# Altium PCB PCB1.PcbDoc
Units mil, origin at the board's own origin, x right, y up, seen from the top; angles counter-clockwise.
Board outline 3937.01 x 2285 mil, 2 copper layers (Top Layer, Bottom Layer); 34 components, 39 nets, 100 pads, 16 vias.
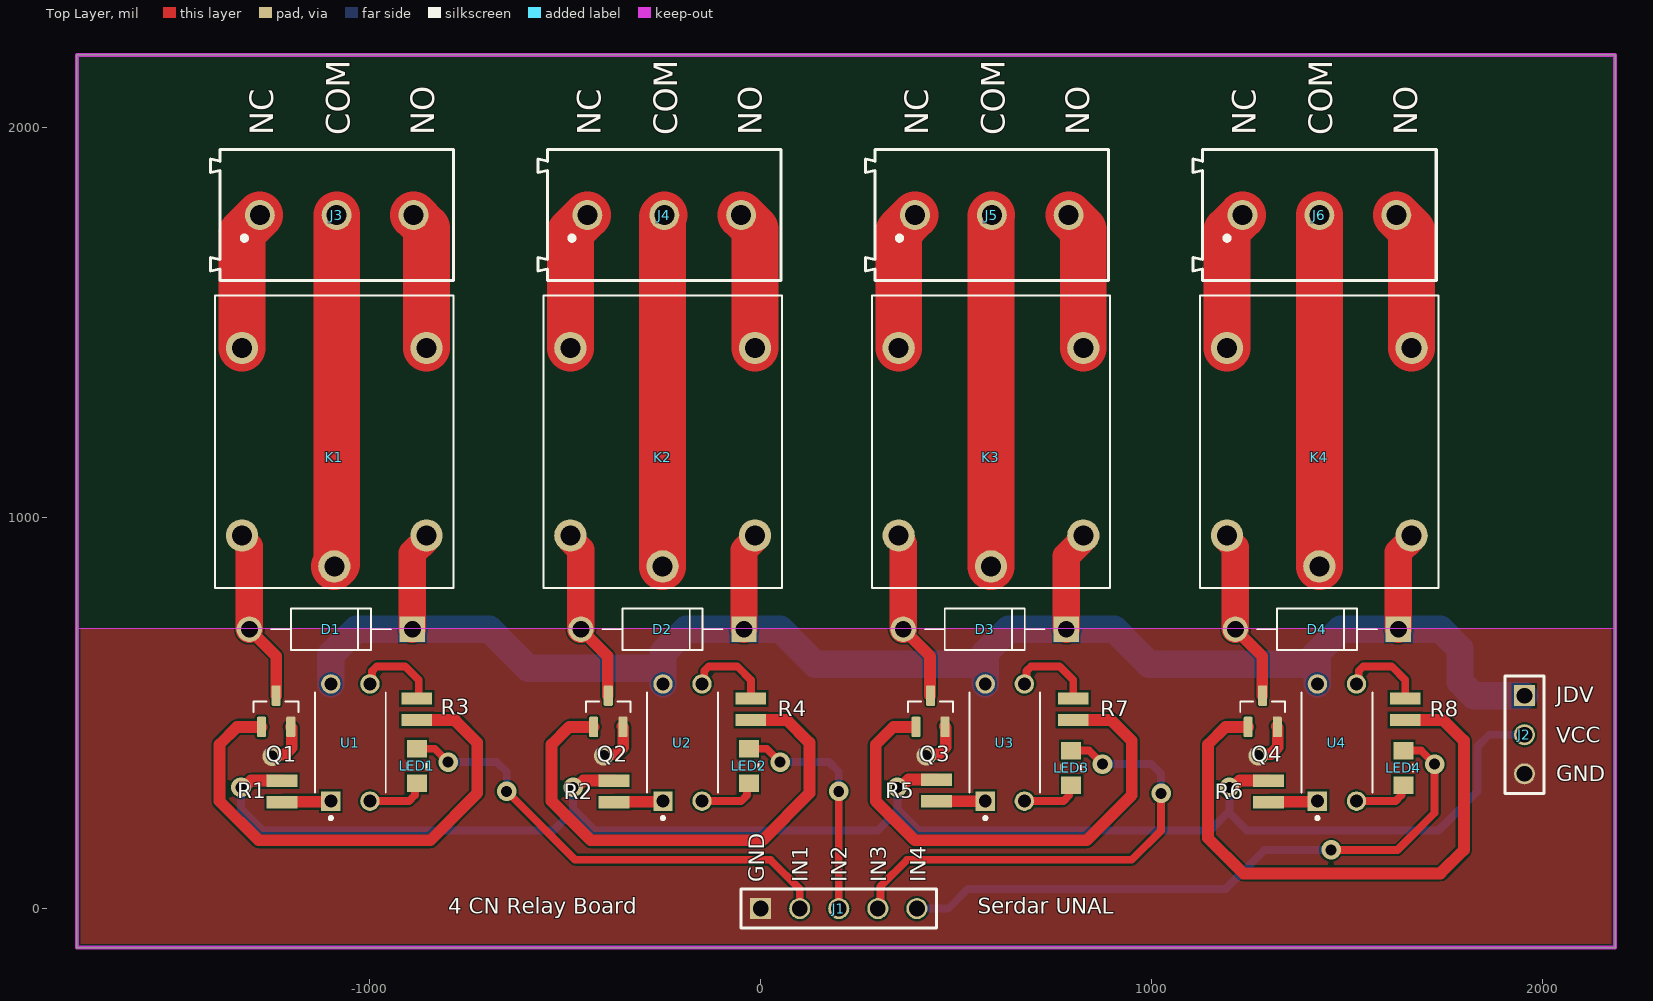
[diagram p0: Top Layer view]
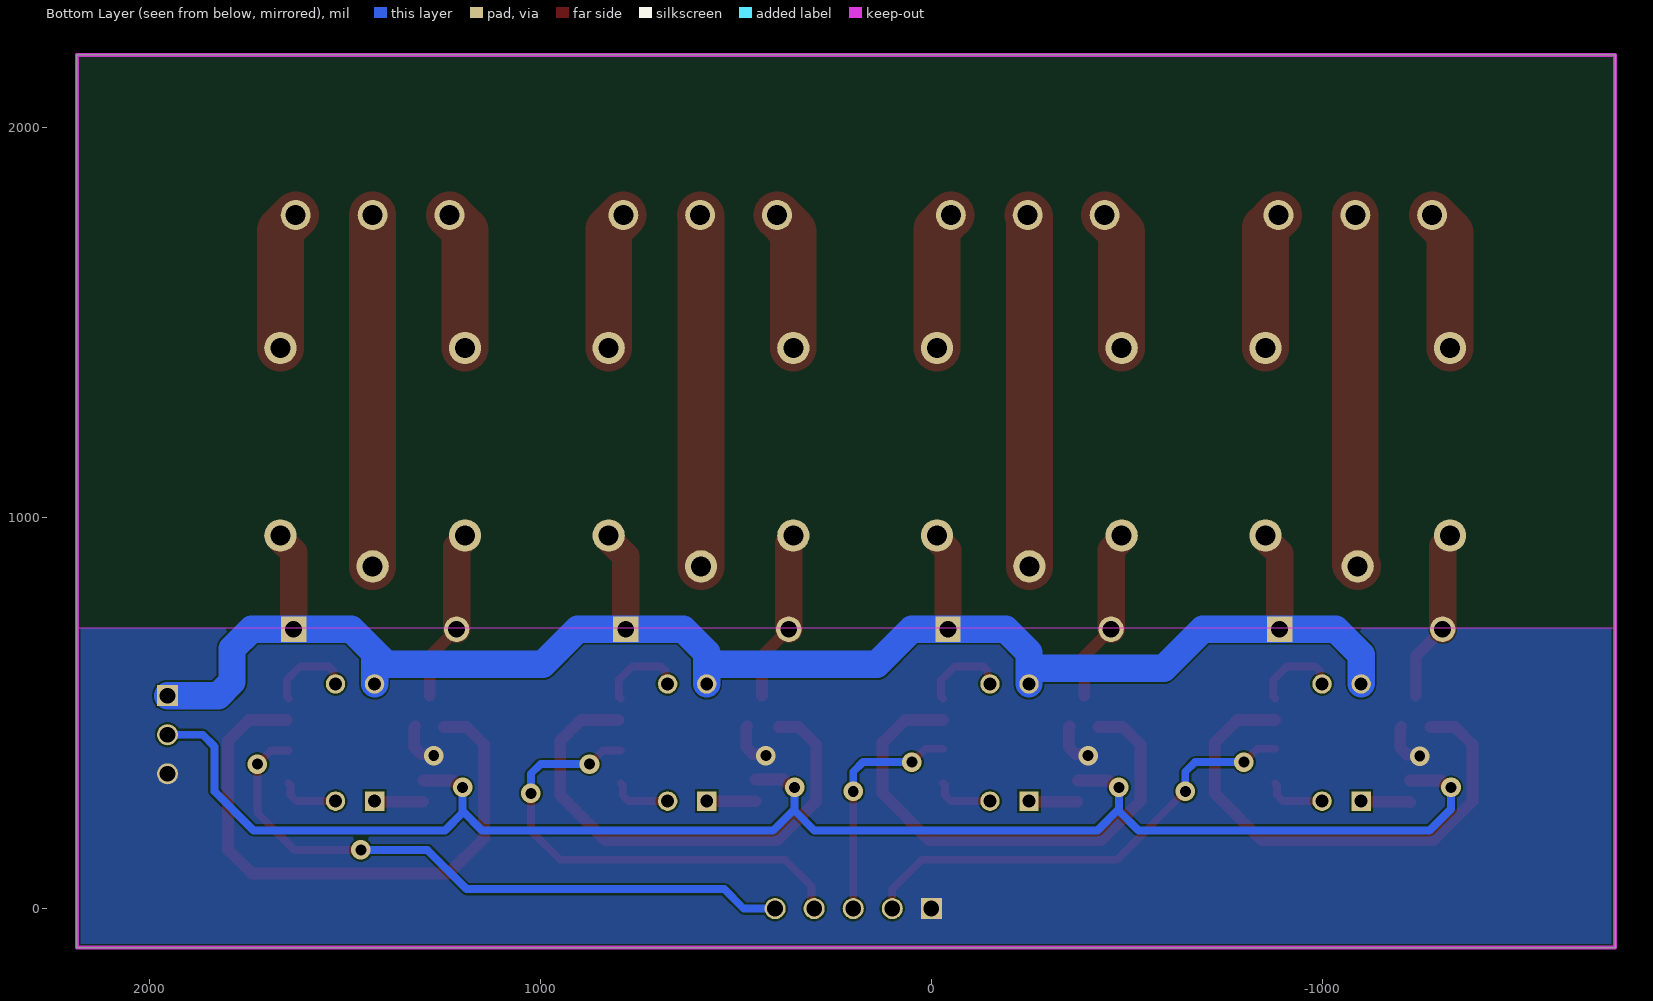
[diagram p1: Bottom Layer view, seen from below]
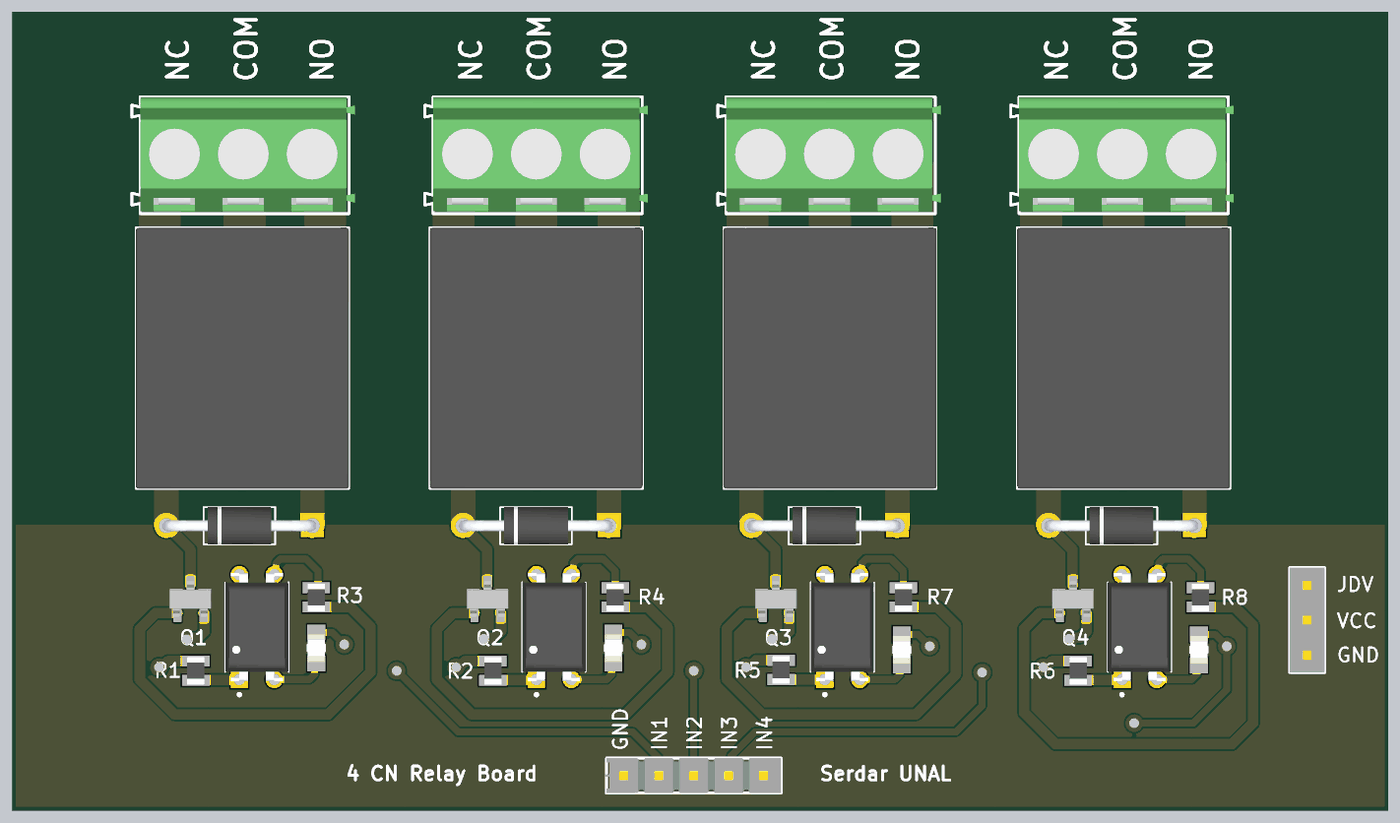
[diagram p2: 3D render of the assembled board from above, using the file's embedded part models]

## Layer stack, top to bottom
Top Solder: solder mask 0.4, Solder Resist, Dk 3.5
Top Layer: signal copper 1.4
Dielectric 1: dielectric 12.6, FR-4, Dk 4.8
Bottom Layer: signal copper 1.4
Bottom Solder: solder mask 0.4, Solder Resist, Dk 3.5

## Board outline
-1750,-100 -1750,2185 2187.01,2185 2187,2184.99 2187,-100

## Design rules (kind name [scope] priority, off if disabled: settings)
Clearance [All] p1: gap=5 ignorepadtopadclearanceinfootprint=FALSE
PolygonConnect [All] p1: connectstyle=Direct reliefconductorwidth=10 reliefentries=4 polygonreliefangle="90 Angle" airgapwidth=10
RoutingVias [All] p1: holewidth=34 width=17 viastyle="Through Hole" minholewidth=17 minwidth=34 maxholewidth=25 maxwidth=50
SolderMaskExpansion [All] p1: expansion=4 istentingtop=FALSE
SupplyNets "Schematic Supply Nets_1" [InNet('VCC')] p1: voltage=0.000
SupplyNets "Schematic Supply Nets" [InNet('GND')] p2: voltage=0.000
Width [All] p1: maxlimit=300 minlimit=10 preferedwidth=100 minimp=50.000000 maximp=50.000000 favimp=50.000000
30 further rules are at their usual default settings.

## Components (designator, comment, footprint, x,y, rotation, side; value= is the part's Value field where it differs from the comment)
D1 "1N4007RLG" 1N4007 -1100,715 r180 top
D2 "1N4007RLG" 1N4007 -251.34,715 r180 top
D3 "1N4007RLG" 1N4007 573.66,715 r180 top
D4 "1N4007RLG" 1N4007 1423.66,715 r180 top
J1 "TSW-105-07-L-S-LL" SAMTEC_TSW-105-07-L-S-LL 0,0 r0 top
J2 "TSW-101-23-S-T" SAMTEC_TSW-101-23-S-T 1955,545 r180 top
J3 "691213710003" 691213710003 -1085,1775 r0 top
J4 "691213710003" 691213710003 -246.67,1775 r0 top
J5 "691213710003" 691213710003 591.67,1775 r0 top
J6 "691213710003" 691213710003 1430,1775 r0 top
K1 "HLS8L-DC5V-S-C" REY5-19.0X15.0X15.0MM -1091.22,1194.84 r90 top
K2 "HLS8L-DC5V-S-C" REY5-19.0X15.0X15.0MM -250.81,1194.84 r90 top
K3 "HLS8L-DC5V-S-C" REY5-19.0X15.0X15.0MM 589.59,1194.84 r90 top
K4 "HLS8L-DC5V-S-C" REY5-19.0X15.0X15.0MM 1430,1194.84 r90 top
LED1 "0805" LED_7012X1 -880,365 r270 top
LED2 "0805" LED_7012X1 -30,365 r270 top
LED3 "0805" LED_7012X1 795,360 r270 top
LED4 "0805" LED_7012X1 1645,360 r270 top
Q1 "MMBT2222A RFG" SOT95P237X112-3N -1240,505 r90 top
Q2 "MMBT2222A RFG" SOT95P237X112-3N -390,505 r90 top
Q3 "MMBT2222A RFG" SOT95P237X112-3N 435,505 r90 top
Q4 "MMBT2222A RFG" SOT95P237X112-3N 1285,505 r90 top
R1 "220" RES_ERJB3CFR12V -1225,300 r90 top
R2 "220" RES_ERJB3CFR12V -375,300 r90 top
R3 "470" RES_ERJB3CFR12V -880,510 r270 top
R4 "470" RES_ERJB3CFR12V -25,510 r270 top
R5 "220" RES_ERJB3CFR12V 450,302.56 r90 top
R6 "220" RES_ERJB3CFR12V 1300,300 r90 top
R7 "470" RES_ERJB3CFR12V 800,510 r270 top
R8 "470" RES_ERJB3CFR12V 1650,510 r270 top
U1 "PC817X3NSZ1B" DIP762W50P254L495H455Q4 -1050,425 r90 top
U2 "PC817X3NSZ1B" DIP762W50P254L495H455Q4 -200,425 r90 top
U3 "PC817X3NSZ1B" DIP762W50P254L495H455Q4 625,425 r90 top
U4 "PC817X3NSZ1B" DIP762W50P254L495H455Q4 1475,425 r90 top

## Footprints (in the part's own frame and the unit in brackets; to place one, negate y for a bottom-side part, rotate by r counter-clockwise, add the part's x,y. Pads: shape width x height; smd on the part's side, far side on the other; paste and mask are expansions set on the pad)
1N4007 [mm]
  round 1.65 hole 1.1 mask+0.102: A(5.3,0)
  rect 1.65x1.65 / inner round 1.65 / far side rect 1.65x1.65 hole 1.1 mask+0.102: C(-5.3,0)
  silkscreen extent -3.9,-1.35 3.9,1.35, body extent -5.57,-1.36 5.57,1.36, height 2.71
691213710003 [mm]
  round 1.95 hole 1.3: 1(-5,0) 2(0,0) 3(5,0)
  silkscreen extent -8.2,-4.25 7.6,4.25, body extent -7.6,-4.06 8,4.24, height 9.54
DIP762W50P254L495H455Q4 [mm]
  rect 1.26x1.26 / inner round 1.26 / far side rect 1.26x1.26 hole 0.84: 1(-3.81,1.27)
  round 1.26 hole 0.84: 2(-3.81,-1.27) 3(3.81,-1.27) 4(3.81,1.27)
  silkscreen extent -5.01,-2.3 3.25,2.3, body extent -3.94,-2.3 3.94,2.3, height 5.06
LED_7012X1 [mm]
  rect 1.15x1.3 smd: A(1.125,0) C(-1.125,0)
  silkscreen extent -0.23,-0.63 0.23,0.63, body extent -1,-0.62 1,0.62, height 0.73
RES_ERJB3CFR12V [mm]
  rect 0.8x2 smd: 1(-0.7,0) 2(0.7,0)
  body extent -1,-0.63 1,0.63, height 0.6
REY5-19.0X15.0X15.0MM [mm]
  round 2.1 hole 1.3: 1(-8.1,0) 2(-6.1,-6) 3(-6.1,6) 4(6.1,-6) 5(6.1,6)
  silkscreen extent -9.5,-7.75 9.5,7.75, body extent -9.5,-7.75 9.5,7.75, height 15.8
SAMTEC_TSW-101-23-S-T [mm]
  rect 1.37x1.37 hole 1.02: 01(0,0)
  round 1.37 hole 1.02: 02(0,2.54) 03(0,5.08)
  silkscreen extent -1.27,-1.27 1.27,6.35, body extent -1.27,-1.27 1.27,6.35, height 8.38
SAMTEC_TSW-105-07-L-S-LL [mm]
  rect 1.37x1.37 hole 1.02: 01(0,0)
  round 1.37 hole 1.02: 02(2.54,0) 03(5.08,0) 04(7.62,0) 05(10.16,0)
  silkscreen extent -1.27,-1.27 11.43,1.27, body extent -1.4,-1.27 11.43,1.27, height 8.38
SOT95P237X112-3N [mm]
  rrect25% 1.32x0.59 smd paste+0 mask+0.102: 1(-1.015,0.95) 2(-1.015,-0.95) 3(1.015,0)
  silkscreen extent -0.04,-1.46 0.65,1.46, body extent -1.3,-1.52 1.3,1.52, height 1.2

## Part data
D1 D2 D3 D4: "Rectifier Diode Switching 1KV 1A 2-Pin DO-41 T/R", Package="DO-41 onsemi", Check_prices=https://www.snapeda.com/parts/1N4007RLG/Onsemi/view-part/?ref=eda, MF=onsemi, MP=1N4007RLG, SnapEDA_Link=https://www.snapeda.com/parts/1N4007RLG/Onsemi/view-part/?ref=snap
J1 J2: Package=None, Availability=Unavailable, Price=None
  J1: MP=TSW-105-07-L-S-LL
  J2: MP=TSW-101-23-S-T
J3 J4 J5 J6: "Serie 213 - 5,0mm pitch - Modular THT - Green - Horizontal cable entry Rising Cage Clamp 10mm height - 03p", Package=None, Check_prices=https://www.snapeda.com/parts/691213710003/Wurth+Electronics/view-part/?ref=eda, MF="Wurth Electronics", MP=691213710003, SnapEDA_Link=https://www.snapeda.com/parts/691213710003/Wurth+Electronics/view-part/?ref=snap
K1 K2 K3 K4: "DIP Power Relay 5V-7A;", Package=None, Check_prices=https://www.snapeda.com/parts/HLS8L-DC5V-S-C/Helishun/view-part/?ref=eda, MF=Helishun, MP=HLS8L-DC5V-S-C, SnapEDA_Link=https://www.snapeda.com/parts/HLS8L-DC5V-S-C/Helishun/view-part/?ref=snap
LED1 LED2 LED3 LED4: library part 7012X1, "Red - LED Indication - Discrete 1.7V 0805 (2012 Metric)", Package="0805 Visual Communications", Check_prices=https://www.snapeda.com/parts/7012X1/VCC/view-part/?ref=eda, MF=VCC, MP=7012X1, SnapEDA_Link=https://www.snapeda.com/parts/7012X1/VCC/view-part/?ref=snap
Q1 Q2 Q3 Q4: "SOT-23, 75V, 0.6A, NPN Transistor", Package="SOT-23 Taiwan Semiconductor", Check_prices=https://www.snapeda.com/parts/MMBT2222A%20RFG/taiwan/view-part/?ref=eda, MF="Taiwan Semiconductor", MP="MMBT2222A RFG", SnapEDA_Link=https://www.snapeda.com/parts/MMBT2222A%20RFG/taiwan/view-part/?ref=snap
R1 R2 R3 R4 R5 R6 R7 R8: library part ERJ-B3CFR12V, Package=None, Availability=Unavailable, MP=ERJB3CFR12V, Price=None
U1 U2 U3 U4: "Optoisolator Transistor Output - 1 Channel 4-DIP", Package="DIP-4 Sharp Microelectronics", Check_prices=https://www.snapeda.com/parts/PC817X3NSZ1B/Sharp/view-part/?ref=eda, MF="Sharp Microelectronics", MP=PC817X3NSZ1B, SnapEDA_Link=https://www.snapeda.com/parts/PC817X3NSZ1B/Sharp/view-part/?ref=snap

## Via types
v1: diameter 50, hole 28, Top Layer to Bottom Layer, tented both sides, 16 vias

## Nets (pads, with @x,y where several pads share a name; then routed paths per layer and width w, separated by ;. In a path a pad name is that pad's centre, name@x,y a point inside that pad or via, vN(x,y) a via of type N, cw(c..) or ccw(c..) an arc to the next point about the centre after c; other vN are vias at no path point)
COM1: J3.2 K1.1 | length 901.6
  Top Layer w120: K1.1 -1085,882.17 J3.2
COM2: J4.2 K2.1 | length 900.8
  Top Layer w120: K2.1 -250.81,1770.85 J4.2
COM3: J5.2 K3.1 | length 899.9
  Top Layer w120: K3.1 589.59,1772.93 J5.2
COM4: J6.2 K4.1 | length 899.1
  Top Layer w120: K4.1 J6.2
GND: J1.01 J2.03 Q1.2 Q2.2 Q3.2 Q4.2 | length 454.3
  Top Layer w30: v1(-1250,390) -1246.17,393.83 -1217.57,393.83 -1200,411.4 -1200,462.44 Q1.2 ; v1(-401.3,391.3) -397.47,395.13 -368.87,395.13 -351.3,412.7 -351.3,463.74 Q2.2@-353.9,466.34 ; v1(423.7,391.3) 427.53,395.13 456.13,395.13 473.7,412.7 473.7,463.74 Q3.2@471.1,466.34 ; v1(1273.7,391.3) 1277.53,395.13 1306.13,395.13 1323.7,412.7 1323.7,463.74 Q4.2@1321.1,466.34
IN1: J1.02 LED1.C | length 1208.1
  Top Layer w20: LED1.C -834.29,409.29 v1(-800,375) ; v1(-650,300) -475,125 25,125 100,50 J1.02
  Bottom Layer w20: v1(-800,375) -675,375 -650,350 v1(-650,300)
IN2: J1.03 LED2.C | length 604.6
  Top Layer w20: LED2.C 15.71,409.29 v1(50,375) ; J1.03 v1(200,300)
  Bottom Layer w20: v1(50,375) 175,375 200,350 v1(200,300)
IN3: J1.04 LED3.C | length 1236.7
  Top Layer w20: J1.04 306.49,6.49 306.49,56.49 375,125 950,125 1025,200 v1(1025,295) ; LED3.C 840.71,404.29 v1(875,370)
  Bottom Layer w20: v1(875,370) 1000,370 1025,345 v1(1025,295)
IN4: J1.05 LED4.C | length 1645.7
  Top Layer w20: v1(1460,150) 1630,150 1725,245 v1(1725,370) 1690.71,404.29 LED4.C
  Bottom Layer w20: J1.05 480,0 530,50 1190,50 1290,150 v1(1460,150)
JDVCC: D1.C D2.C D3.C D4.C J2.01 K1.2 K2.2 K3.2 K4.2 U1.4 U2.4 U3.4 U4.4 | length 4741.7
  Top Layer w70: D1.C -891.34,909.5 -855,945.84 K1.2 ; D2.C -42.68,917.76 -14.59,945.84 K2.2 ; D3.C 782.32,902.35 825.81,945.84 K3.2 ; D4.C 1632.32,911.95 1666.22,945.84 K4.2
  Bottom Layer w70: U1.4 -1100,650 -1035,715 D1.C -695,715 -595,615 -250,615 ; U2.4 -250,615 ; U3.4 575,615 ; U4.4 1425,655 ; J2.01 1825,545 1790,580 1790,665 1740,715 D4.C 1485,715 1425,655 ; -250,615 -250,655 -190,715 D2.C 50,715 140,625 565,625 575,615 ; 575,615 575,655 635,715 D3.C 905,715 995,625 1395,625 1425,655
NC1: J3.1 K1.5 | length 358.9
  Top Layer w120: K1.5 -1327.44,1729.41 J3.1
NC2: J4.1 K2.5 | length 358
  Top Layer w120: K2.5 -487.03,1731.48 J4.1
NC3: J5.1 K3.5 | length 357.2
  Top Layer w120: K3.5 353.37,1733.56 J5.1
NC4: J6.1 K4.5 | length 356.3
  Top Layer w120: K4.5 1193.78,1735.63 J6.1
NetD1_A: D1.A K1.3 Q1.3 | length 445.9
  Top Layer w30: D1.A -1240,646.34 Q1.3
  Top Layer w50: K1.3 -1327.44,945.84 K1.3@-1308.66,927.06
  Top Layer w70: D1.A K1.3@-1308.66,927.06
NetD2_A: D2.A K2.3 Q2.3 | length 449.4
  Top Layer w30: D2.A -391.34,646.34 Q2.3@-391.34,544.96
  Top Layer w50: K2.3@-487.03,945.84 K2.3
  Top Layer w70: K2.3@-487.03,945.84 -460,918.81 D2.A
NetD3_A: D3.A K3.3 Q3.3 | length 443
  Top Layer w30: D3.A 433.66,646.34 Q3.3@433.66,544.96
  Top Layer w50: K3.3 353.37,945.84 K3.3@365,934.22
  Top Layer w70: D3.A K3.3@365,934.22
NetD4_A: D4.A K4.3 Q4.3 | length 447
  Top Layer w30: D4.A 1283.66,646.34 Q4.3@1283.66,544.96
  Top Layer w50: K4.3@1193.78,945.84 K4.3
  Top Layer w70: K4.3@1193.78,945.84 1215,924.62 D4.A
NetLED1_A: LED1.A U1.2 | length 154
  Top Layer w20: U1.2 -900,275 -885,290 -885,315.71 LED1.A
NetLED2_A: LED2.A U2.2 | length 154
  Top Layer w20: U2.2 -50,275 -35,290 -35,315.71 LED2.A
NetLED3_A: LED3.A U3.2 | length 154
  Top Layer w20: U3.2 775,275 790,290 790,315.71 LED3.A@795,320.71
NetLED4_A: LED4.A U4.2 | length 154
  Top Layer w20: U4.2 1625,275 1640,290 1640,315.71 LED4.A@1645,320.71
NetQ1_1: Q1.1 R3.2 | length 1331.2
  Top Layer w30: Q1.1 -1339.96,465.04 -1385,420 -1385,275 -1285,175 -845,175 -725,295 -725,425 -782.44,482.44 R3.2
NetQ2_1: Q2.1 R4.2 | length 1331.2
  Top Layer w30: Q2.1 -489.96,465.04 -535,420 -535,275 -435,175 5,175 125,295 125,425 67.56,482.44 R4.2@-30,482.44
NetQ3_1: Q3.1 R7.2 | length 1314.4
  Top Layer w30: Q3.1@390,465.04 340.04,465.04 295,420 295,275 395,175 835,175 950,290 950,430 897.56,482.44 R7.2
NetQ4_1: Q4.1 R8.2 | length 1530.1
  Top Layer w30: Q4.1 1190.04,465.04 1145,420 1145,180 1235,90 1740,90 1800,150 1800,430 1747.56,482.44 R8.2
NetR1_1: R1.1 U1.1 | length 126.1
  Top Layer w30: R1.1 -1224.25,273.19 -1101.81,273.19 U1.1
NetR2_1: R2.1 U2.1 | length 126.1
  Top Layer w20: R2.1 R2.1@-373.72,273.72 ; U2.1@-251.28,273.72 U2.1
  Top Layer w30: R2.1@-373.72,273.72 U2.1@-251.28,273.72
NetR3_1: R3.1 U1.3 | length 223.8
  Top Layer w20: U1.3 -994.34,580.66 -994.34,608.28 -982.62,620 -910,620 -875,585 -875,542.56 R3.1
NetR4_1: R4.1 U2.3 | length 223.8
  Top Layer w20: U2.3 -144.34,580.66 -144.34,608.28 -132.62,620 -60,620 -25,585 -25,542.56 R4.1@-30,537.56
NetR5_1: R5.1 U3.1 | length 125
  Top Layer w30: R5.1 U3.1
NetR6_1: R6.1 U4.1 | length 126.1
  Top Layer w20: R6.1 R6.1@1301.28,273.72 ; U4.1@1423.72,273.72 U4.1
  Top Layer w30: R6.1@1301.28,273.72 U4.1@1423.72,273.72
NetR7_1: R7.1 U3.3 | length 223.8
  Top Layer w20: U3.3 680.66,580.66 680.66,608.28 692.38,620 765,620 800,585 800,542.56 R7.1@795,537.56
NetR8_1: R8.1 U4.3 | length 223.8
  Top Layer w20: U4.3 1530.66,580.66 1530.66,608.28 1542.38,620 1615,620 1650,585 1650,542.56 R8.1@1645,537.56
NO1: J3.3 K1.4 | length 353.7
  Top Layer w120: J3.3 -855,1741.85 K1.4
NO2: J4.3 K2.4 | length 354.6
  Top Layer w120: J4.3 -14.59,1739.78 K2.4
NO3: J5.3 K3.4 | length 355.4
  Top Layer w120: J5.3 825.81,1737.7 K3.4
NO4: J6.3 K4.4 | length 356.3
  Top Layer w120: J6.3 1666.22,1735.63 K4.4
VCC: J2.02 R1.2 R2.2 R5.2 R6.2 | length 4338.1
  Top Layer w30: v1(-1330,310) -1321.88,310 -1304.32,327.56 R1.2 ; v1(-480,310) -471.88,310 -454.32,327.56 R2.2 ; v1(350,310) 358.12,310 378.24,330.12 R5.2 ; v1(1200,310) 1208.12,310 1225.68,327.56 R6.2
  Bottom Layer w20: v1(-1330,310) -1330,255 -1275,200 -530,200 -480,250 -480,255 ; v1(-480,310) -480,255 ; 1200,250 1150,200 405,200 350,255 v1(350,310) 350,250 300,200 -425,200 -480,255 ; v1(1200,310) 1200,245 1245,200 1735,200 1835,300 1835,415 1865,445 J2.02

## Polygon pours and split planes (outlines as drawn)
GND on Top Layer "Top Layer - GND" (solid, remove dead copper, pour order 1): -1750,-100 -1750,2185 2187.01,2185 2187,2184.99 2187,-100
GND on Bottom Layer "Bottom Layer - GND" (solid, remove dead copper, pour order 2): -1750,-100 -1750,2185 2187.01,2185 2187,2184.99 2187,-100

## Keep-outs
Keep-Out Layer:
  pour cut-out: -1750,2185 -1752,2183 -1752,718 2187,718 2187,2184.99 -1749.99,2184.99
  lines w10: -1750,2185 2187.01,2185 ; -1750,2185 2187.01,2185 ; -1750,2185 -1750,-100 2187,-100 2187,-86 2187,2184.99 ; 2187,2184.99 2187.01,2185

## Silkscreen, mask and mechanical layers (free items; w line width, h text height)
Top Overlay:
  text "NC" at -1248,1979 h60 r90
  text "COM" at -1052,1979 h60 r90
  text "NO" at -835,1979 h60 r90
  text "NC" at -409.67,1979 h60 r90
  text "COM" at -213.67,1979 h60 r90
  text "NO" at 3.33,1979 h60 r90
  text "NC" at 428.67,1979 h60 r90
  text "COM" at 624.67,1979 h60 r90
  text "NO" at 841.67,1979 h60 r90
  text "NC" at 1267,1979 h60 r90
  text "COM" at 1463,1979 h60 r90
  text "NO" at 1680,1979 h60 r90
  text "JDV" at 2036.12,528 h40
  text "VCC" at 2036,424 h40
  text "GND" at 2036.12,326.2 h40
  text "GND" at 9,68 h40 r90
  text "IN1" at 121,68 h40 r90
  text "IN2" at 221,68 h40 r90
  text "IN3" at 321,68 h40 r90
  text "IN4" at 422,68 h40 r90
  text "4 CN Relay Board" at -800,-13 h40
  text "Serdar UNAL" at 556,-13 h40
Mechanical 1:
  lines w5: -1750,2185 2187.01,2185 ; -1750,2185 -1750,-100 2187,-100 2187,2184.99 ; -1750,2185 2187.01,2185 ; 2187,2184.99 2187.01,2185